# Altium PCB FPSInterface.PcbDoc
Units mm, origin at the board's own origin, x right, y up, seen from the top; angles counter-clockwise.
Board outline 30 x 25.98 mm, 4 copper layers (Top Layer, Ground Layer, Power Layer, Bottom Layer), stack 0.778 mm thick; 29 components, 25 nets, 140 pads, 63 vias.
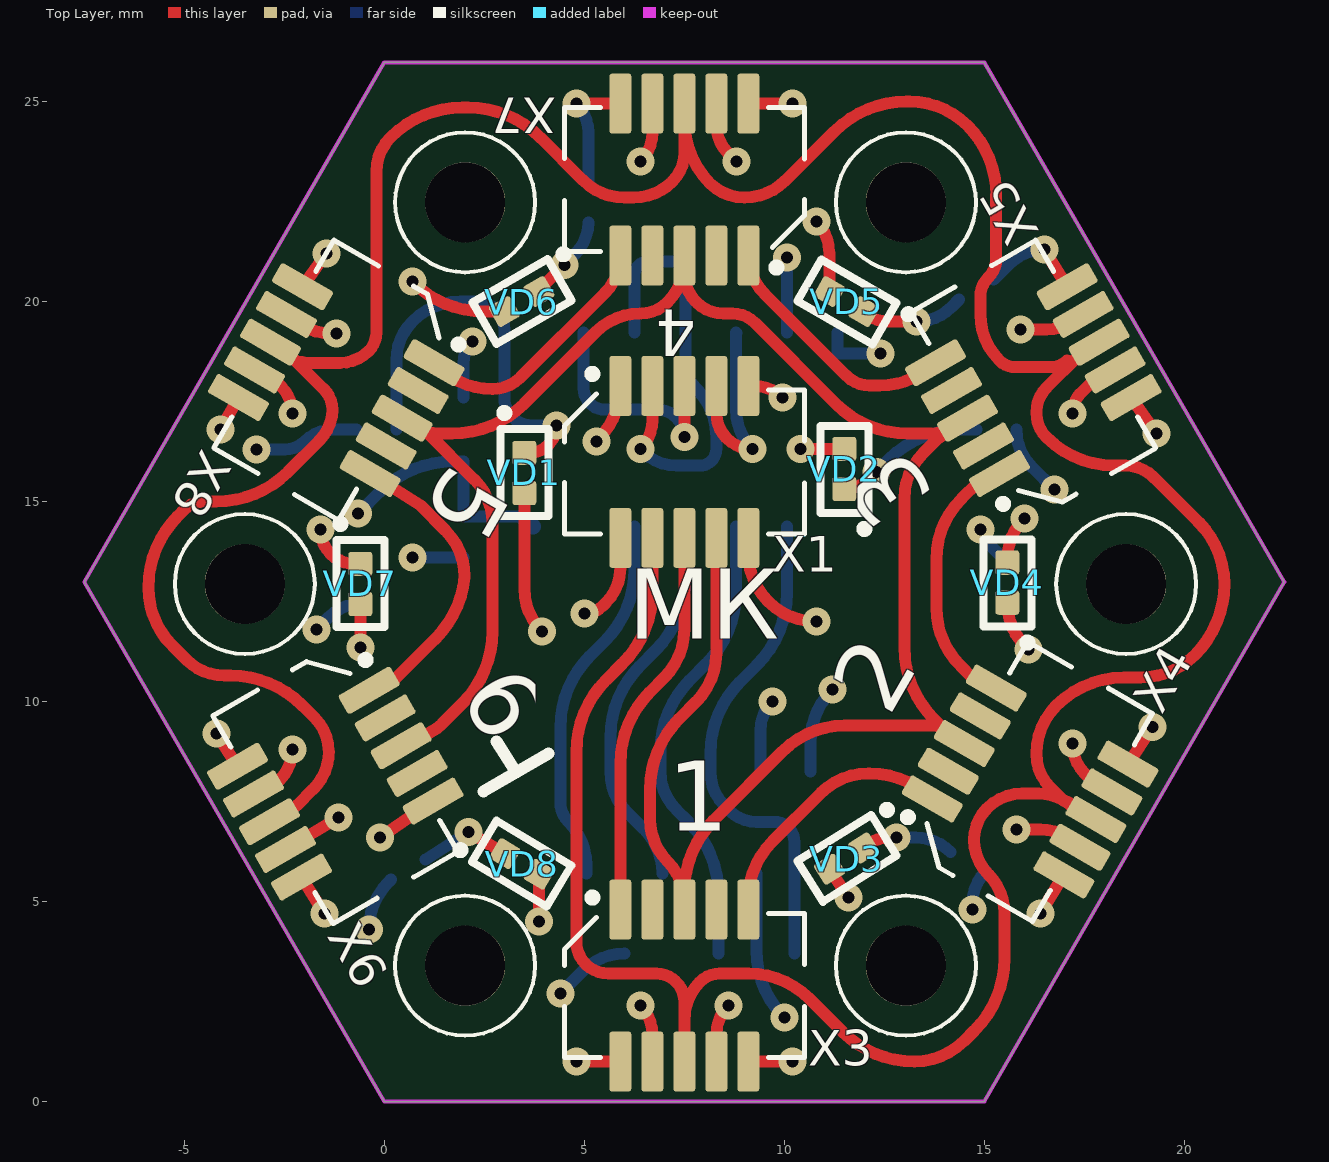
[diagram p0: Top Layer view]
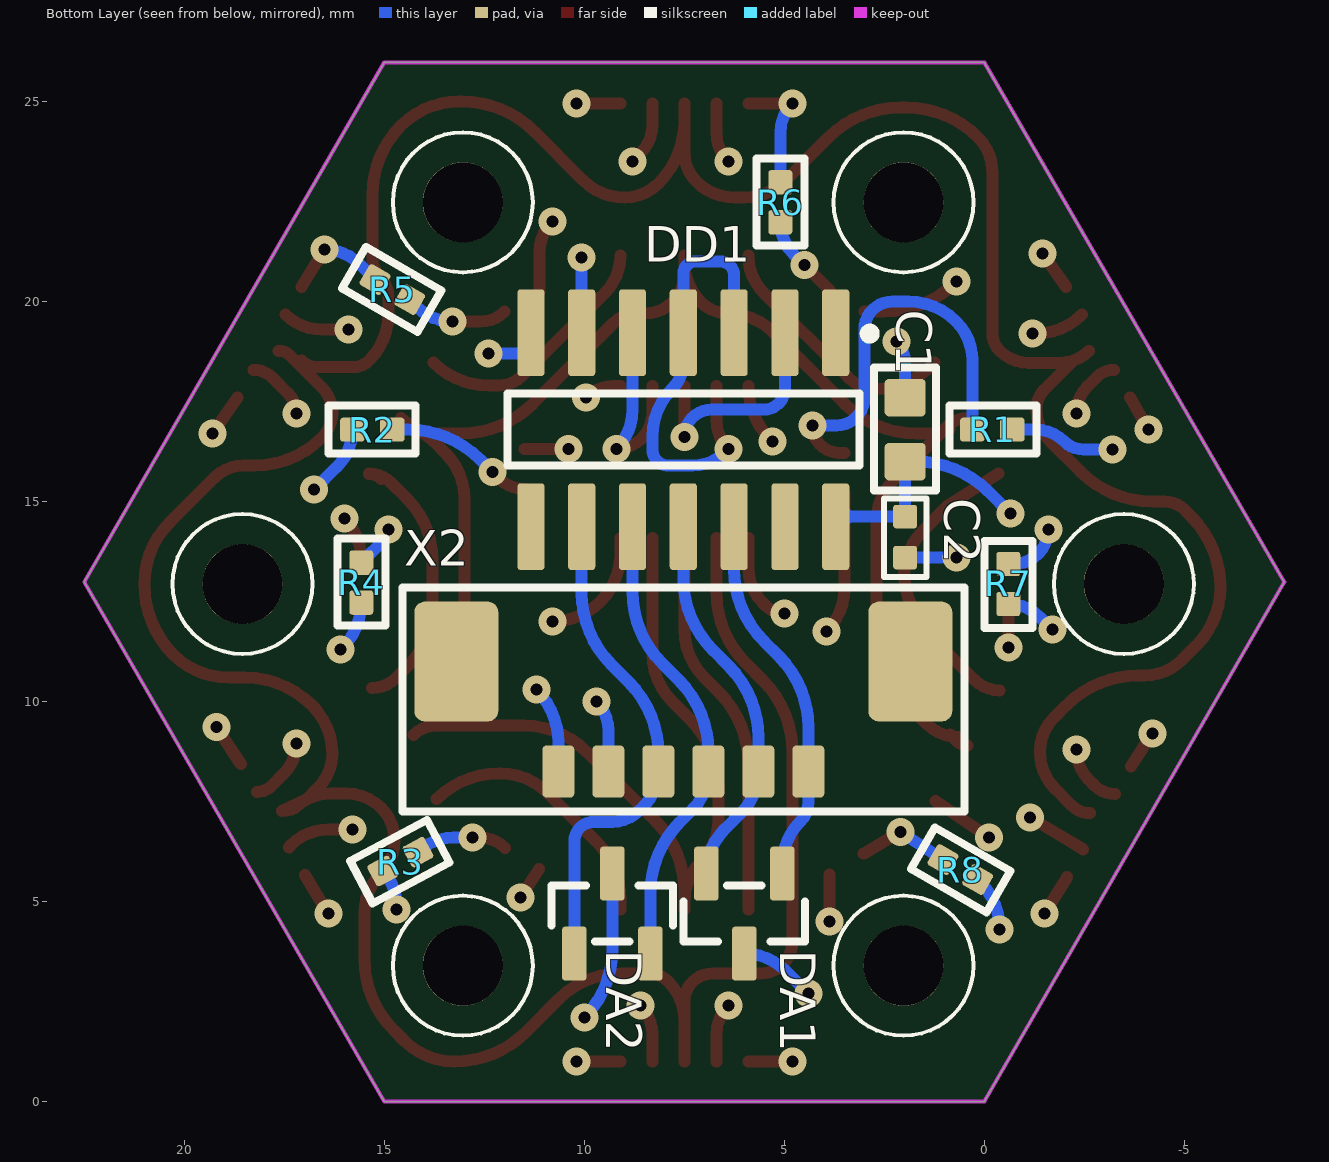
[diagram p1: Bottom Layer view, seen from below]
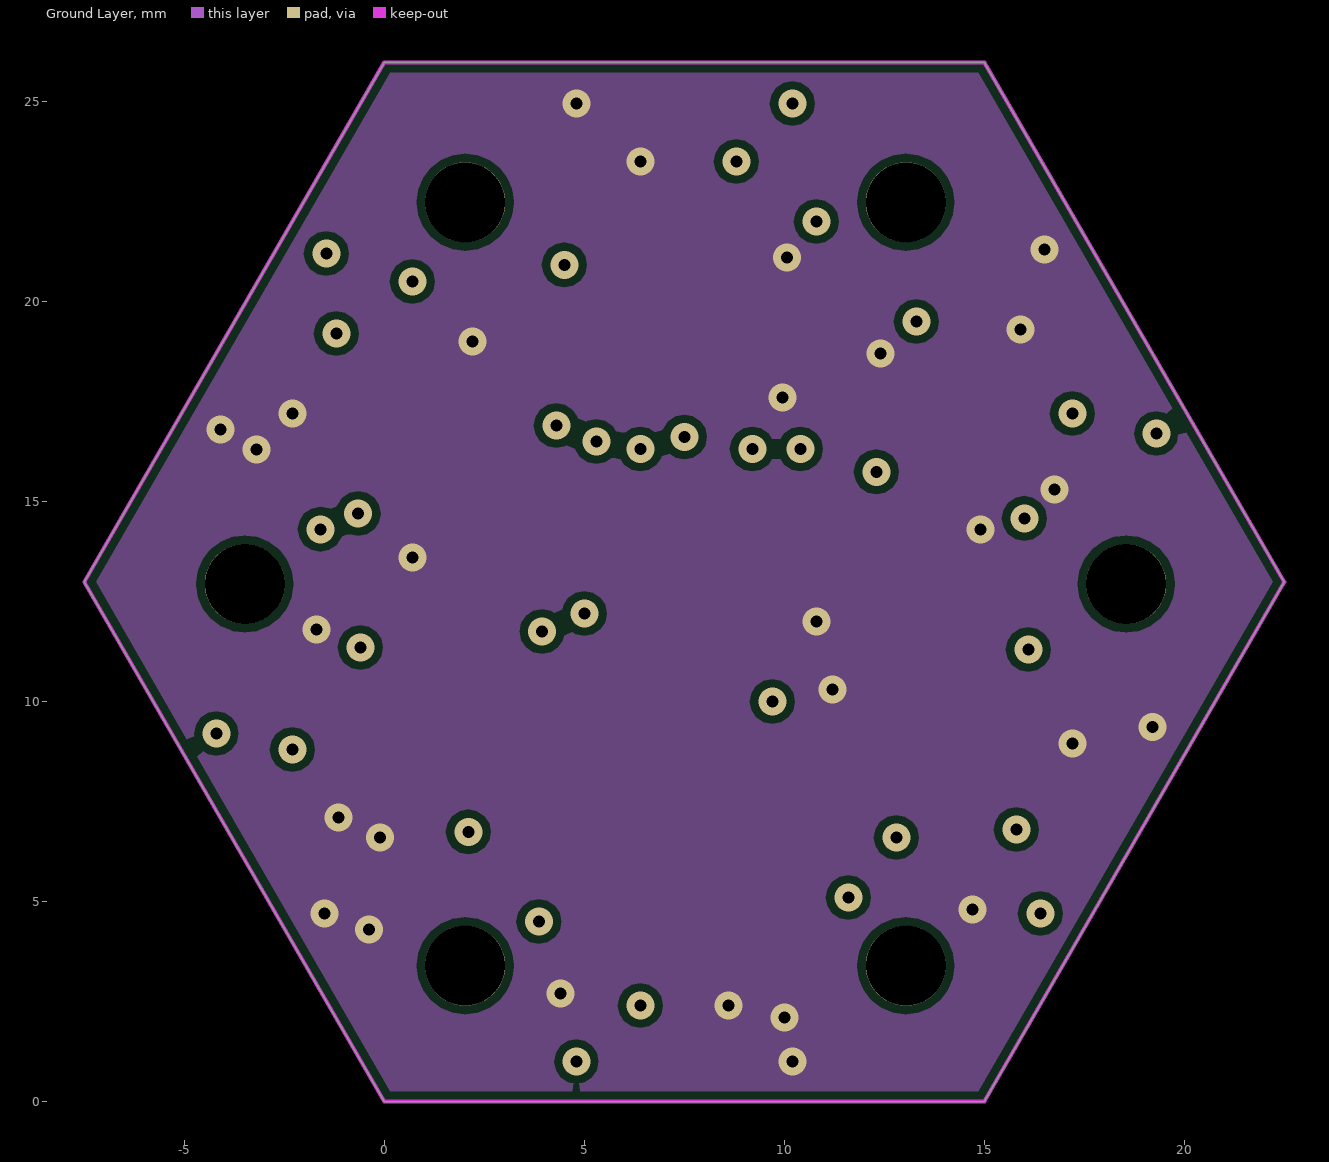
[diagram p2: Ground Layer]
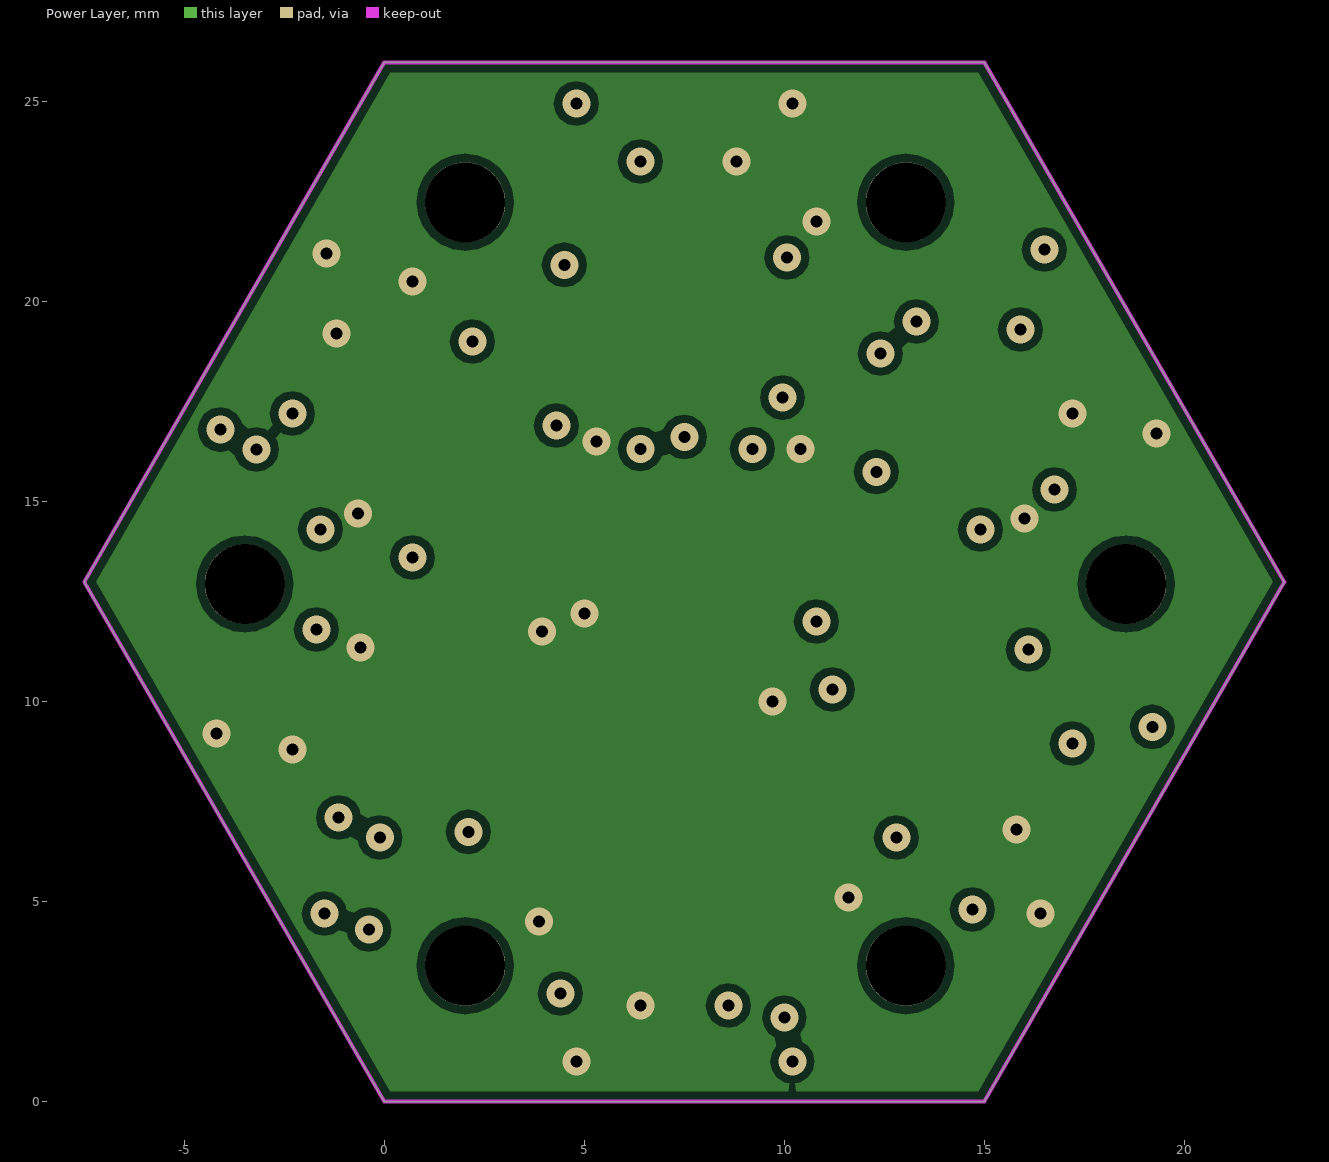
[diagram p3: Power Layer]
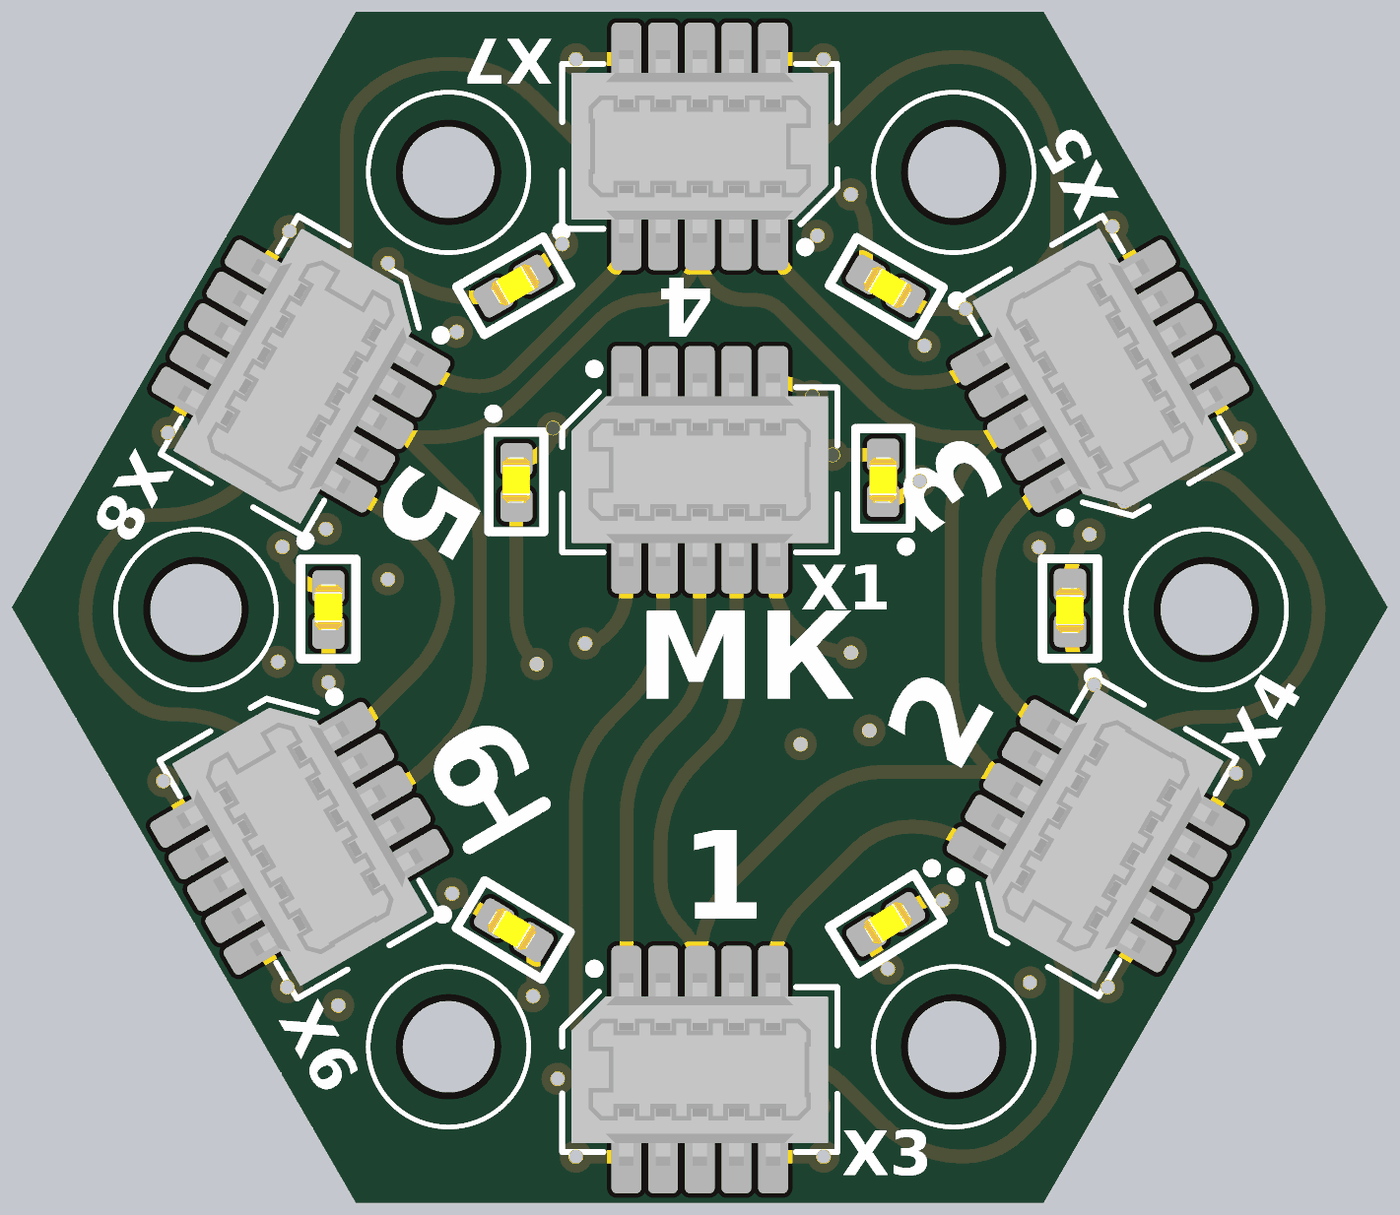
[diagram p4: 3D render of the assembled board from above, using the file's embedded part models]
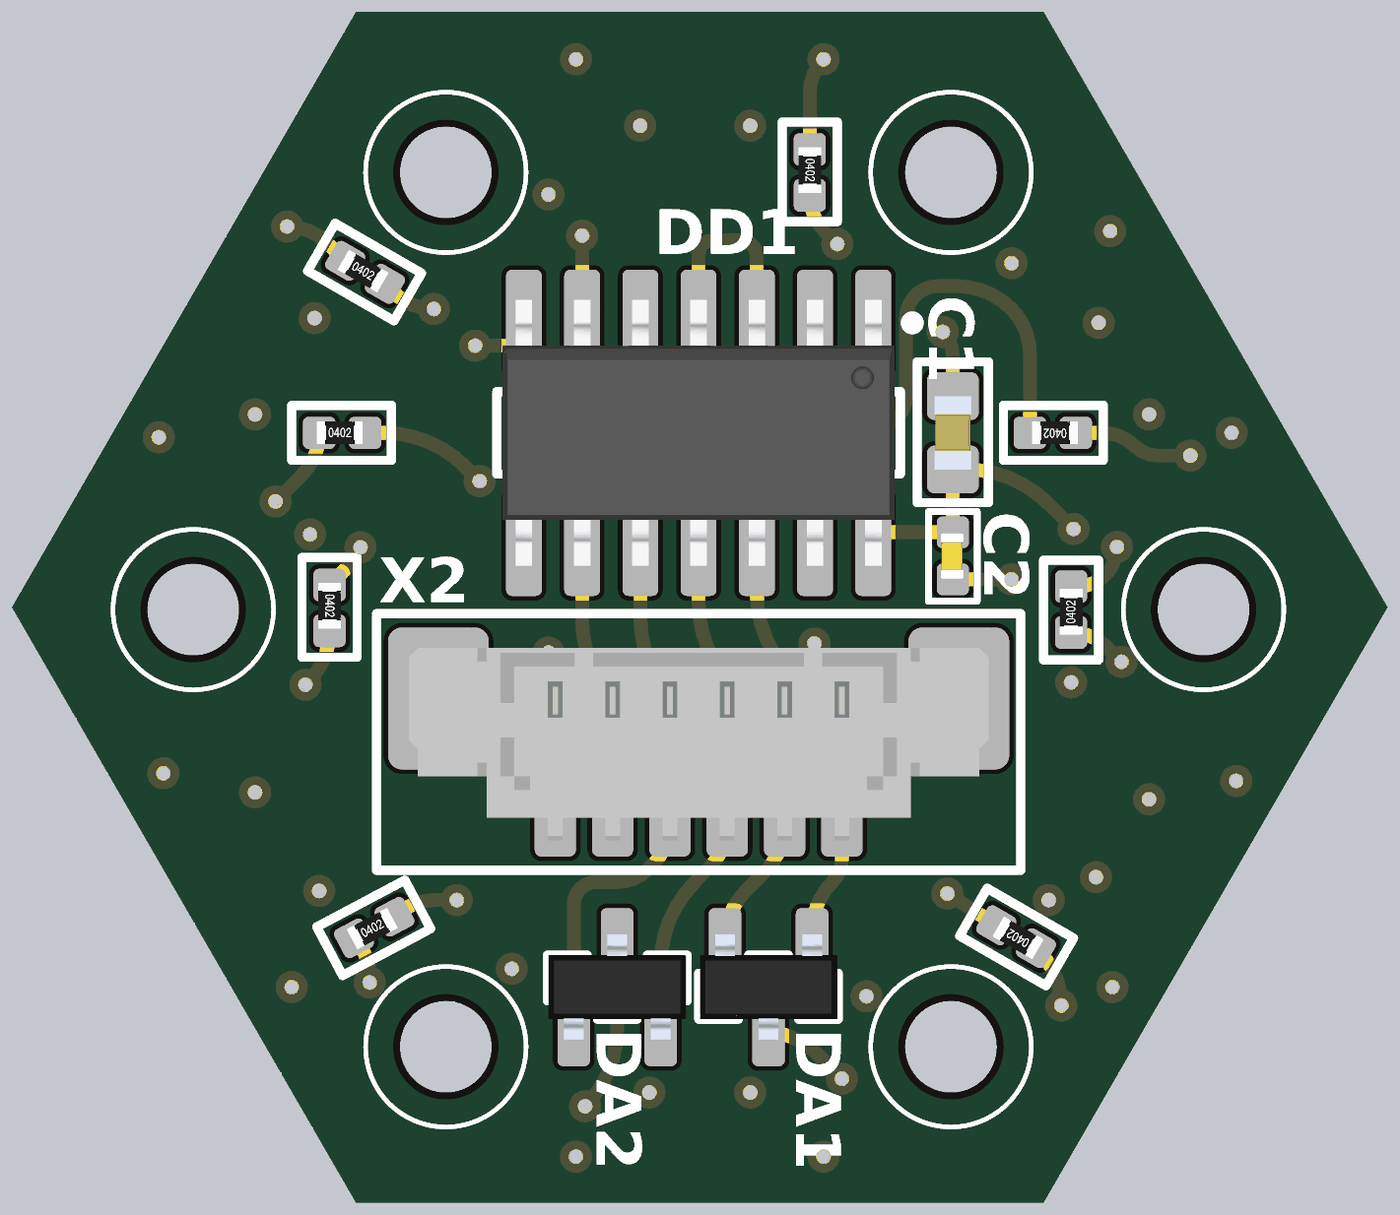
[diagram p5: 3D render of the assembled board from below, using the file's embedded part models]

## Layer stack, top to bottom
Top Solder: solder mask 0.0102, Solder Resist, Dk 3.5
Top Layer: signal copper 0.0356
Dielectric 1: core 0.254, FR-4, Dk 4.2
Ground Layer: signal copper 0.036
Dielectric 3: prepreg 0.127, Dk 4.2
Power Layer: signal copper 0.036
Dielectric 2: core 0.254, Dk 4.2
Bottom Layer: signal copper 0.0356
Bottom Solder: solder mask 0.0102, Solder Resist, Dk 3.5

## Board outline
22.5,12.99 15,25.981 0,25.981 -7.5,12.99 0,0 15,0

## Design rules (kind name [scope] priority, off if disabled: settings)
Clearance [All] p1: gap=0.2 ignorepadtopadclearanceinfootprint=FALSE
HoleSize [All] p1: absolutevalues=TRUE maxlimit=20 minlimit=0.025 maxpercent=80.000 minpercent=20.000
MinimumSolderMaskSliver [All] p1: minsoldermaskwidth=0.04
PasteMaskExpansion [All] p1: expansion=0.05
PolygonConnect PolygonConnect_via [All vs IsVia] p1: connectstyle=Direct reliefconductorwidth=0.254 reliefentries=4 polygonreliefangle="90 Angle" airgapwidth=0.254
PolygonConnect [All] p2: connectstyle=Relief reliefconductorwidth=0.6 reliefentries=4 polygonreliefangle="90 Angle" airgapwidth=0.2
RoutingVias [All] p1: holewidth=0.711 width=1.27 viastyle="Through Hole" minholewidth=0.711 minwidth=1.27 maxholewidth=0.711 maxwidth=1.27
SilkToSilkClearance [All] p1: silktosilkclearance=0
SilkToSolderMaskClearance [IsPad] p1: minsilkscreentomaskgap=0 clearancetoexposedcopper=TRUE
SolderMaskExpansion [All] p1: expansion=0.15
Width [All] p1: maxlimit=3 minlimit=0.15 preferedwidth=0.2
25 further rules are at their usual default settings.

## Components (designator, comment, footprint, x,y, rotation, side; value= is the part's Value field where it differs from the comment)
C1 "Capacitor" C0603 1.98,16.798 r270 bottom value=1мк
C2 "Capacitor" C0402 2,14.1 r90 bottom value=0,1мк
DA1 "SM712" SOT23-3 6,4.7 r270 bottom
DA2 "SM712" SOT23-3 9.3,4.7 r90 bottom
DD1 "Name" SO14 7.525,16.798 r270 bottom
R1 "Resistor_0,062Вт" R0402 -0.2,16.798 r0 bottom value=510
R2 "Resistor_0,062Вт" R0402 15.3,16.798 r180 bottom value=510
R3 "Resistor_0,062Вт" R0402 14.6,6 r152 bottom value=510
R4 "Resistor_0,062Вт" R0402 15.575,12.975 r270 bottom value=510
R5 "Resistor_0,062Вт" R0402 14.8,20.3 r210 bottom value=510
R6 "Resistor_0,062Вт" R0402 5.1,22.481 r270 bottom value=510
R7 "Resistor_0,062Вт" R0402 -0.6,12.94 r90 bottom value=510
R8 "Resistor_0,062Вт" R0402 0.6,5.8 r30 bottom value=510
VD1 "LED" L_0402_YELLOW 3.5,15.765 r270 top
VD2 "LED" L_0402_YELLOW 11.5,15.765 r90 top
VD3 "LED" L_0402_YELLOW 11.6,6.1 r212 top
VD4 "LED" L_0402_YELLOW 15.575,12.925 r90 top
VD5 "LED" L_0402_YELLOW 11.6,19.975 r150 top
VD6 "LED" L_0402_YELLOW 3.475,20.025 r210 top
VD7 "LED" L_0402_YELLOW -0.6,12.99 r270 top
VD8 "LED" L_0402_YELLOW 3.4,5.966 r329 top
X1 "\"Плата контроллера\"" SlimStack-10pin-vert-sct 7.5,15.99 r180 top locked
X2 "\"Вход\"" MOLEX_533980671 7.525,8.25 r180 bottom
X3 "Header_10_sct" SlimStack-10pin-vert-sct 7.5,2.9 r180 top locked
X4 "Header_10_sct" SlimStack-10pin-vert-sct 16.144,8 r240 top locked
X5 "Header_10_sct" SlimStack-10pin-vert-sct 16.225,18.034 r300 top locked
X6 "Header_10_sct" SlimStack-10pin-vert-sct -1.225,7.946 r120 top locked
X7 "Header_10_sct" SlimStack-10pin-vert-sct 7.5,23.05 r0 top locked
X8 "Header_10_sct" SlimStack-10pin-vert-sct -1.2,18.034 r60 top locked

## Footprints (in the part's own frame and the unit in brackets; to place one, negate y for a bottom-side part, rotate by r counter-clockwise, add the part's x,y. Pads: shape width x height; smd on the part's side, far side on the other; paste and mask are expansions set on the pad)
C0402 [mm]
  rrect25% 0.59x0.6 smd: 1(-0.5,-0.02) 2(0.525,-0.02)
  silkscreen extent -0.98,-0.55 0.98,0.51, body extent -0.49,-0.25 0.51,0.25, height 0.48
C0603 [mm]
  rrect25% 0.94x1.03 smd: 1(-0.8,0) 2(0.8,0)
  silkscreen extent -1.55,-0.78 1.53,0.77, body extent -0.8,-0.4 0.8,0.4, height 0.9
L_0402_YELLOW [mm] "SMD LED LAMP"
  rrect25% 0.61x0.6 smd: 1(-0.45,0) 2(0.55,0)
  silkscreen extent -1.55,-0.6 1.13,0.6, body extent -0.5,-0.3 0.5,0.3, height 0.2
MOLEX_533980671 [mm]
  rrect25% 0.8x1.3 smd: 1(3.125,0) 2(1.875,0) 3(0.625,0) 4(-0.625,0) 5(-1.875,0) 6(-3.125,0)
  rrect25% 2.1x3 smd: ""(-5.675,2.75) ""(5.675,2.75)
  silkscreen extent -7.03,-1 7.02,4.6, body extent -6.32,-0.35 6.33,3.85, height 4.7
R0402 [mm]
  rrect25% 0.61x0.6 smd: 1(-0.5,0) 2(0.5,0)
  silkscreen extent -1.1,-0.6 1.08,0.6, body extent -0.55,-0.25 0.45,0.25, height 0.35
SlimStack-10pin-vert-sct [mm]
  rrect25% 0.55x1.5 smd: 1(1.6,-1.9) 2(1.6,1.9) 3(0.8,-1.9) 4(0.8,1.9) 5(0,-1.9) 6(0,1.9) 7(-0.8,-1.9) 8(-0.8,1.9) 9(-1.6,-1.9) 10(-1.6,1.9)
  silkscreen extent -3,-2.3 3,1.8, body extent -2.8,-2.1 2.8,2.1, height 3.53
SO14 [mm] "SOIC, 14-Leads, Body 8,65x3,90mm, Pitch 1,27mm, IPC Medium Density"
  rrect25% 2.17x0.68 smd: 1(-2.425,3.81) 2(-2.425,2.54) 3(-2.425,1.27) 4(-2.425,0) 5(-2.425,-1.27) 6(-2.425,-2.54) 7(-2.425,-3.81) 8(2.425,-3.81) 9(2.425,-2.54) 10(2.425,-1.27) 11(2.425,0) 12(2.425,1.27) 13(2.425,2.54) 14(2.425,3.81)
  silkscreen extent -2.52,-4.4 0.9,4.78, body extent -2.9,-4.28 2.9,4.28, height 1.75
SOT23-3 [mm]
  rrect25% 1.35x0.61 smd: 1(-1,0.95) 2(-1,-0.95) 3(1,0)
  silkscreen extent -0.7,-1.52 0.7,1.52, body extent -1.15,-1.5 1.15,1.5, height 1.1

## Part data
C1: library part cap133, "Конденсатор", Manufacture=Murata, Part Name=Ceramic, Part Number=GRM188R71C105KA12D**, Voltage=16B, id=cap133, TKE=X7R
C2: library part cap277, "Конденсатор", Manufacture=Murata, Part Name=Ceramic, Part Number=GRM155R71H104KE14D, Voltage=50В, id=cap277, tga=0,10%, TKE=X7R
DA1 DA2: library part diode4, "TVS", Manufacture=Semtech, Part Name="TVS diode RS-485", Part Number=SM712.TCT, Reverse Current=1mA, id=diode4, Number=2
DD1: library part interf33, "Fail-Safe, High-Speed (10Mbps),  Slew-Rate-Limited RS-485/RS-422 Transceivers", Current Consumption=900uA, Manufacture="Maxim Integrated", Part Name="RS-485/RS-422 Transceivers", Part Number=MAX3086ESD+, Power Supply=4.75-5.25V, id=interf33, Interface=RS422/485, Mode of Work=Full-Duplex, Number of Channel=2, Speed=10Mbps, Type Supply="Single Polar"
R1 R2 R3 R4 R5 R6 R7 R8: library part res263, "Резистор", Manufacture=Yageo, Part Name=Resistor, Part Number=RC0402FR-07510RL, Power=0,062Вт, Accuracy=0,01, id=res263
VD1 VD2 VD3 VD4 VD5 VD6 VD7 VD8: library part diode29, "Светодиод", Part Name="LED yellow", Part Number=KPHHS-1005SYCK, id=diode29
X1 X3 X4 X5 X6 X7 X8: library part connect225, "Разъем - 10 конт. розетка", Manufacture=Molex, Part Name="SlimStack Board-to-Board Connector", Part Number=524651071, Contact_2=+5B, Contact_10=GND, Etch=0.8mm, id=connect225
  X1: Contact_1=+5B, Contact_3=SSI_REDE, Contact_4=CONVST_MCU, Contact_5=SSI_CLOCK, Contact_6=MISO_MCU, Contact_7=SSI_DATA, Contact_8=SCLK_MCU, Contact_9=GND
  X3: Contact_1=DOUT, Contact_3=NC, Contact_4=+5В, Contact_5=SCLK, Contact_6=CONVST, Contact_7=NC, Contact_8=GND, Contact_9=DIN
  X4 X5 X6 X7 X8: Contact_1=DOUT, Contact_3=NC, Contact_4=+5B, Contact_5=SCLK, Contact_6=CONVST, Contact_7=NC, Contact_8=GND, Contact_9=DIN
X2: library part connect226, "Разъем - 6 конт. розетка", Manufacture=Molex, Part Name="PicoBlade PCB Header", Part Number=533980671, Contact_1=DATA+, Contact_2=DATA-, Contact_3=CLK-, Contact_4=CLK+, Contact_5=+5B, Contact_6=GND, Etch=1.25mm, id=connect226

## Free pads (board coordinates)
  round 2 hole 2 unplated: ""(-3.488,12.939) ""(2.021,3.397) ""(2.021,22.481) ""(13.038,3.397) ""(13.039,22.481) ""(18.547,12.939)

## Via types
v1: diameter 0.7, hole 0.3, Top Layer to Bottom Layer, tented both sides, 63 vias

## Nets (pads, with @x,y where several pads share a name; then routed paths per layer and width w, separated by ;. In a path a pad name is that pad's centre, name@x,y a point inside that pad or via, vN(x,y) a via of type N, cw(c..) or ccw(c..) an arc to the next point about the centre after c; other vN are vias at no path point)
+5B: C1.2 C2.2 DD1.14 VD1.2 VD2.2 VD3.2 VD4.2 VD5.2 VD6.2 VD7.2 VD8.2 X1.1 X1.2 X2.5 X3.2 X3.4 X4.2 X4.4 X5.2 X5.4 X6.2 X6.4 X7.2 X7.4 X8.2 X8.4 | length 41.2
  Top Layer w0.3: v1(-4.2,9.2) X6.2 ; X6.4 ccw(c-3.27,8.419) -2.754,7.903 -2.613,8.044 ccw(c-3.369,8.8) v1(-2.3,8.8) ; X8.4 ccw(c-1.293,20.83) -1.293,19.2 v1(-1.2,19.2) ; X8.2 v1(-1.451,21.2) ; v1(-0.6,11.352) VD7.2 ; v1(0.7,20.5) 0.706,20.494 ccw(c2.502,22.29) 2.502,19.75 VD6.2 ; VD1.2 3.5,12.822 ccw(c5.013,12.822) v1(3.943,11.752) ; v1(3.865,4.5) 3.872,4.507 VD8.2 ; v1(4.8,1) X3.2 ; v1(5,12.2) ccw(c5,12.849) 5.459,12.39 5.544,12.475 ccw(c4.684,13.335) 5.9,13.335 X1.2 ; v1(5.3,16.5) 5.341,16.541 ccw(c3.992,17.89) X1.1 ; v1(6.4,2.4) cw(c5.676,1.676) 6.7,1.676 X3.4 ; X7.4 8.3,24.424 ccw(c9.324,24.424) 8.6,23.7 v1(8.8,23.5) ; X7.2 v1(10.2,24.95) ; v1(10.4,16.315) VD2.2 ; v1(10.8,22) cw(c10.019,21.219) 11.123,21.219 VD5.2 ; VD3.2 v1(11.6,5.1) ; VD4.2 15.575,13.553 cw(c17.026,13.553) v1(16,14.579) ; v1(15.8,6.8) 16.4,6.8 cw(c16.4,5.481) 17.333,6.414 X4.4 ; v1(16.4,4.7) X4.2 ; v1(17.2,17.2) cw(c17.923,17.2) 17.412,17.711 17.796,18.095 cw(c18.27,17.62) X5.4 ; X5.2 v1(19.3,16.7)
  Bottom Layer w0.3: v1(-0.653,14.7) -0.099,15.254 cw(c1.698,13.458) 1.698,15.998 C1.2 C2.2 DD1.14@3.463,14.625 ; X2.5 9.4,9.276 cw(c10.424,9.276) v1(9.7,10)
  Bottom Layer w0.4: DD1.14@3.463,14.625 DD1.14
GND: C1.1 C2.1 DA1.3 DA2.3 DD1.6 DD1.7 R1.1 R2.1 R3.1 R4.1 R5.1 R6.1 R7.1 R8.1 X1.9 X1.10 X2.6 X3.8 X3.10 X4.8 X4.10 X5.8 X5.10 X6.8 X6.9 X6.10 X7.8 X7.10 X8.8 X8.10 | length 48.6
  Top Layer w0.3: v1(-4.1,16.798) X8.10 ; X8.8 cw(c-3.245,17.679) -2.812,18.112 -2.583,17.883 cw(c-3.266,17.2) v1(-2.3,17.2) ; X6.8 v1(-1.141,7.1) ; X6.10 v1(-1.5,4.7) ; v1(-0.112,6.6) X6.9 ; v1(4.8,24.95) X7.10 ; v1(6.4,23.5) ccw(c5.676,24.224) 6.7,24.224 X7.8 ; X3.8 8.3,1.676 cw(c9.324,1.676) v1(8.6,2.4) ; X3.10 v1(10.2,1) ; X1.10 9.1,13.7 ccw(c10.8,13.7) v1(10.8,12) ; X1.9 9.252,17.89 cw(c9.252,16.895) v1(9.956,17.599) ; v1(15.9,19.3) 16.56,19.3 ccw(c16.56,20.588) X5.8 ; v1(16.5,21.3) X5.10 ; v1(17.2,8.95) ccw(c18.258,8.95) 17.51,8.202 17.813,7.899 ccw(c18.189,8.274) X4.8 ; X4.10 v1(19.2,9.366)
  Bottom Layer w0.3: v1(-3.2,16.3) -2.483,16.3 ccw(c-2.483,16.983) -2,16.5 cw(c-1.281,15.781) -1.281,16.798 R1.1 ; v1(-1.7,11.8) -1.385,12.115 cw(c-0.6,11.33) R7.1 ; v1(-0.386,4.3) cw(c1.298,4.3) 0.108,5.491 R8.1 ; v1(0.7,13.6) C2.1 ; C1.1 1.98,18.469 cw(c2.731,18.469) v1(2.2,19) ; v1(4.4,2.7) 4.976,3.276 cw(c6,2.251) DA1.3 ; v1(4.8,24.95) cw(c4.076,24.226) 5.1,24.226 R6.1 ; DA2.3 9.3,3.79 ccw(c11.69,3.79) v1(10,2.1) ; DD1.6 v1(10.065,21.1) v1@10.065,21.19 ; X2.6 10.65,8.972 cw(c12.528,8.972) v1(11.2,10.3) ; DD1.7 11.335,18.7 v1(12.4,18.7) ; v1(14.7,4.8) 14.7,4.941 cw(c15.866,4.941) R3.1 ; v1(14.9,14.3) ccw(c15.262,14.3) 15.006,14.044 R4.1 ; R5.1 15.617,20.934 cw(c16.5,20.052) v1(16.5,21.3) ; R2.1 ccw(c17.115,16.798) 16.185,15.868 v1(16.753,15.3)
MCU_CONVST: X1.4 X3.6 X4.6 X5.6 X6.6 X7.6 X8.6 | length 104.4
  Top Layer w0.3: X6.6@-2.643,7.212 ccw(c-2.643,7.853) -2.19,7.399 -1.772,7.817 ccw(c-2.698,8.742) -1.389,8.742 ccw(c-2.599,8.742) -1.743,9.598 -2.052,9.906 ccw(c-3.848,8.11) -3.848,10.65 -4,10.65 cw(c-4,11.979) -4.94,11.04 -5.3,11.4 cw(c-3.853,12.848) -5.9,12.848 cw(c-3.36,12.848) -5.156,14.644 -5.012,14.788 cw(c-4.5,14.276) -4.5,15 -4.204,15 ccw(c-4.204,17.54) -2.408,15.744 -1.617,16.535 ccw(c-2.381,17.3) -1.3,17.3 ccw(c-2.024,17.3) -1.512,17.812 -2.224,18.524 ; X8.6@-2.618,18.769 ccw(c-1.896,19.491) -2.224,18.524 ; X1.4 6.7,12.746 cw(c4.16,12.746) 5.956,10.95 5.544,10.538 ccw(c7.34,8.742) 4.8,8.742 4.8,4 ccw(c5.6,4) 5.6,3.2 6.8,3.2 cw(c6.8,2.5) 7.5,2.5 7.5,2.034 ; X3.6 7.5,2.034 ; X7.6 X7.6@7.5,24.514 ; 10.024,23.024 cw(c9,24.049) 9,22.6 cw(c9,23.807) 8.146,22.954 cw(c9.707,24.514) X7.6@7.5,24.514 ; 10.024,23.024 11.256,24.256 cw(c13.052,22.46) 13.052,25 13.131,25 cw(c13.131,22.951) 14.58,24.4 cw(c12.845,22.665) 15.298,22.665 15.298,21.078 cw(c14.622,21.078) 15.1,20.6 ccw(c15.583,20.117) 14.9,20.117 14.9,19.682 ccw(c16.537,19.682) 15.38,18.524 ccw(c15.776,18.92) 15.776,18.36 16.674,18.36 ccw(c16.674,18.92) 17.07,18.524 ; X5.6@17.643,18.769 ccw(c17.643,18.361) 17.355,18.65 16.56,17.855 ccw(c17.189,17.227) 16.3,17.227 ccw(c17.186,17.227) 16.56,16.6 ccw(c18.25,18.29) 18.25,15.9 18.528,15.9 cw(c18.528,14.899) 19.236,15.607 20.361,14.482 cw(c18.817,12.938) 21,12.938 cw(c18.493,12.938) 20.266,11.166 cw(c18.9,12.531) 18.9,10.6 18.49,10.6 ccw(c18.49,8.21) 16.8,9.9 ccw(c18.007,8.693) 16.3,8.693 ccw(c17.49,8.693) 16.649,7.851 16.953,7.547 ; -2.224,18.524 ccw(c-1.896,19.491) -1.896,18.47 -1.108,18.47 ccw(c-1.108,19.491) -0.386,18.769 ccw(c-0.834,19.217) -0.2,19.217 -0.2,23.247 cw(c1.015,23.247) 0.156,24.106 cw(c1.952,22.31) 1.952,24.85 2.098,24.85 cw(c2.098,22.31) 3.894,24.106 4.976,23.024 ccw(c6,24.049) 6,22.6 6.234,22.6 ccw(c6.234,23.966) 7.2,23 ccw(c6.476,23.724) 7.5,23.724 X7.6@7.5,24.514 ; 7.5,2.034 cw(c8.866,2.034) 7.9,3 cw(c8.383,2.517) 8.383,3.2 9.1,3.2 cw(c9.1,1.027) 10.636,2.564 11.456,1.744 ccw(c13.252,3.54) 13.252,1 ccw(c13.252,2.756) 14.494,1.514 14.756,1.776 ccw(c12.96,3.573) 15.5,3.573 15.5,4.717 ccw(c14.134,4.717) 15.1,5.683 cw(c15.96,6.542) 14.744,6.542 cw(c15.873,6.542) 15.075,7.341 cw(c15.942,6.474) 15.942,7.7 16.357,7.7 cw(c16.357,6.461) 16.953,7.547 ; 16.953,7.547 cw(c16.357,6.461) 17.233,7.337 ccw(c17.562,8.055) 17.562,7.265 16.953,7.547
MCU_SCLK: X1.8 X3.5 X4.5 X5.5 X6.5 X7.5 X8.5 | length 55.6
  Top Layer w0.3: X6.5 ccw(c0.42,9.268) 0.683,9.005 X6.5@0.8,9.122 ; X8.5 cw(c0.445,16.432) 0.907,16.893 X8.5@1.063,16.737 ; X6.5@0.648,9.112 ccw(c0.648,10.231) X6.5@0.8,9.122 ; X6.5@0.856,9.178 X6.5@0.8,9.122 ; X8.5@0.873,16.799 ccw(c1.374,18.013) X8.5@1.063,16.737 ; 5.285,19.238 cw(c6.4,18.123) 6.4,19.7 ccw(c6.4,20.666) 7.083,19.983 ccw(c6.076,20.99) X7.5@7.5,20.99 ; 5.285,19.238 3.491,17.444 cw(c1.695,19.24) 1.695,16.7 1.374,16.7 cw(c1.374,18.013) X8.5@1.063,16.737 ; X3.5 X3.5@7.5,4.993 ; X7.5 X7.5@7.5,20.99 ; X1.8 8.3,11.207 cw(c6.593,11.207) 7.8,10 7.382,9.582 ccw(c9.164,7.8) 6.644,7.8 6.644,7.06 ccw(c8.142,7.06) 7.083,6 cw(c6.076,4.993) X3.5@7.5,4.993 ; 13.878,9.422 13.744,9.556 cw(c15.54,11.352) 13,11.352 13,15.083 cw(c14.58,15.083) 13.463,16.2 13.78,16.517 X5.5@14.148,16.798 ; X4.5@14.271,9.165 ccw(c13.704,8.598) 13.934,9.366 ccw(c13.704,8.598) 13.704,9.4 11.511,9.4 ccw(c11.511,7.201) 9.956,8.756 8.244,7.044 ccw(c10.04,5.248) 7.5,5.248 X3.5@7.5,4.993 ; X5.5 cw(c13.651,18.013) X5.5@14.148,16.798 ; X6.5@0.8,9.122 ccw(c0.648,10.231) 1.44,9.44 1.956,9.956 ccw(c0.16,11.752) 2.7,11.752 2.7,14.482 ccw(c1.208,14.482) 2.263,15.537 X8.5@1.063,16.737 ; X7.5@7.5,20.99 7.5,20.707 ccw(c8.524,20.707) 7.8,19.983 ccw(c8.483,20.666) 8.483,19.7 8.7,19.7 cw(c8.7,18.895) 9.269,19.464 11.289,17.444 ccw(c13.085,19.24) 13.085,16.7 13.651,16.7 ccw(c13.651,18.013) X5.5@14.148,16.798
NetDA1_1: DA1.1 DD1.12 X2.1 | length 9.4
  Bottom Layer w0.3: DA1.1 5.05,5.914 ccw(c3.514,5.914) 4.6,7 cw(c5.083,7.483) 4.4,7.483 X2.1 4.4,9.348 cw(c6.94,9.348) 5.144,11.144 5.511,11.511 ccw(c3.715,13.307) 6.255,13.307 DD1.12
NetDA1_2: DA1.2 DD1.11 X2.2 | length 9.6
  Bottom Layer w0.3: DA1.2 ccw(c5.381,5.7) 6.49,6.81 6.074,7.226 cw(c7.099,8.25) X2.2 5.65,9.098 cw(c8.19,9.098) 6.394,10.894 6.781,11.281 ccw(c4.985,13.077) 7.525,13.077 DD1.11
NetDA2_1: DA2.1 DD1.9 X2.4 | length 12.6
  Bottom Layer w0.3: DD1.9 10.065,12.717 cw(c7.525,12.717) 9.321,10.921 8.894,10.494 ccw(c10.69,8.698) 8.15,8.698 X2.4 ccw(c9.357,8.25) 8.504,7.396 8.627,7.273 ccw(c9.3,7.945) 9.3,6.994 9.756,6.994 cw(c9.756,6.5) 10.25,6.5 DA2.1
NetDA2_2: DA2.2 DD1.10 X2.3 | length 11.7
  Bottom Layer w0.3: DA2.2 8.35,5.198 ccw(c5.81,5.198) 7.606,6.994 7.289,7.311 cw(c8.228,8.25) X2.3 6.9,8.748 cw(c9.44,8.748) 7.644,10.544 8.051,10.951 ccw(c6.255,12.747) 8.795,12.747 DD1.10
NetR1_2: R1.2 VD1.1 | length 10.2
  Top Layer w0.3: VD1.1 3.615,16.215 ccw(c3.615,16.9) v1(4.3,16.9)
  Bottom Layer w0.3: R1.2 0.3,18.527 cw(c1.683,18.527) 0.705,19.505 cw(c1.9,18.31) 1.9,20 2.3,20 cw(c2.3,19.3) 3,19.3 3,17.6 ccw(c3.7,17.6) 3.7,16.9 v1(4.3,16.9)
NetR2_2: R2.2 VD2.1 | length 3.8
  Top Layer w0.3: VD2.1 ccw(c11.5,16.212) 12.134,15.578 v1(12.3,15.744)
  Bottom Layer w0.3: v1(12.3,15.744) 12.61,16.054 cw(c14.406,14.258) 14.406,16.798 R2.2
NetR3_2: R3.2 VD3.1 | length 2.3
  Top Layer w0.3: VD3.1 cw(c12.613,5.706) 12.613,6.6 v1(12.8,6.6)
  Bottom Layer w0.3: v1(12.8,6.6) 13.277,6.6 cw(c13.277,5.353) R3.2
NetR4_2: R4.2 VD4.1 | length 2.7
  Top Layer w0.3: VD4.1 ccw(c17.144,12.475) 16.034,11.366 v1(16.1,11.3)
  Bottom Layer w0.3: R4.2 ccw(c17.144,12.475) 16.034,11.366 v1(16.1,11.3)
NetR5_2: R5.2 VD5.1 | length 2.6
  Top Layer w0.3: VD5.1 ccw(c12.593,20.353) 12.593,19.5 v1(13.3,19.5)
  Bottom Layer w0.3: v1(13.3,19.5) ccw(c13.3,20.747) 14.182,19.865 R5.2
NetR6_2: R6.2 VD6.1 | length 2.2
  Top Layer w0.3: VD6.1 cw(c3.943,20.25) 3.888,20.305 v1(4.5,20.918)
  Bottom Layer w0.3: v1(4.5,20.918) 4.772,21.19 ccw(c3.982,21.981) R6.2
NetR7_2: R7.2 VD7.1 | length 3
  Top Layer w0.3: v1(-1.6,14.308) ccw(c-0.733,14.308) -0.733,13.44 VD7.1
  Bottom Layer w0.3: v1(-1.6,14.308) ccw(c-0.733,14.308) -0.733,13.44 R7.2
NetR8_2: R8.2 VD8.1 | length 2.3
  Top Layer w0.3: v1(2.1,6.742) VD8.1
  Bottom Layer w0.3: R8.2 v1(2.1,6.742)
NetX1_6: X1.6 X3.1 | length 9.8
  Top Layer w0.3: X3.1 5.9,8.448 cw(c8.44,8.448) 6.644,10.244 7,10.6 ccw(c5.793,11.807) 7.5,11.807 X1.6
NetX3_9: X3.9 X4.1 | length 6.7
  Top Layer w0.3: X3.9 9.1,5.052 cw(c11.148,5.052) 9.7,6.5 10.911,7.711 cw(c12.1,6.522) 12.1,8.203 12.135,8.203 cw(c12.135,6.001) X4.1@13.692,7.558
NetX4_9: X4.9 X5.1 | length 7.1
  Top Layer w0.3: X5.1@15.077,15.565 cw(c15.386,15.256) X5.1@15.386,15.693 ; X4.9@15.304,10.342 cw(c15.304,11.177) 14.714,10.586 14.4,10.9 cw(c15.849,12.349) 13.8,12.349 13.8,13.553 cw(c15.941,13.553) 14.427,15.067 14.832,15.472 cw(c15.38,14.925) X5.1
NetX5_9: X5.9 X7.1 | length 6.4
  Top Layer w0.3: X7.1 ccw(c10.428,21.15) 9.489,20.211 11.563,18.137 ccw(c12.135,18.708) 12.135,17.9 12.383,17.9 ccw(c12.383,19.867) X5.9@13.774,18.476
NetX6_1: X6.1 X8.9 | length 7.6
  Top Layer w0.3: X6.1 ccw(c-0.38,11.173) 0.25,10.543 1.277,11.569 ccw(c-0.519,13.365) 2.009,13.119 ccw(c0.371,13.119) 1.529,14.278 0.907,14.9 X8.9
NetX7_9: X7.9 X8.1 | length 6.4
  Top Layer w0.3: X8.1@1.251,18.476 1.361,18.367 ccw(c2.7,19.706) 2.7,17.812 ccw(c2.7,18.806) 3.403,18.103 5.511,20.211 ccw(c4.572,21.15) X7.9
SSI_CLOCK: DD1.2 X1.5 | length 5.9
  Top Layer w0.3: v1(7.5,16.615) X1.5
  Bottom Layer w0.3: DD1.2 4.985,17.826 ccw(c5.511,17.826) 5.511,17.3 6.815,17.3 cw(c6.815,16.615) v1(7.5,16.615)
SSI_DATA: DD1.5 X1.7 | length 5.1
  Top Layer w0.3: X1.7 8.3,17.215 ccw(c9.2,17.215) v1(9.2,16.315)
  Bottom Layer w0.3: DD1.5@8.8,19.218 DD1.5 8.795,17.293 ccw(c10.178,17.293) v1(9.2,16.315)
SSI_REDE: DD1.3 DD1.4 X1.3 | length 11.6
  Top Layer w0.3: v1(6.4,16.315) ccw(c5.676,17.039) 6.7,17.039 X1.3
  Bottom Layer w0.3: DD1.3 6.255,20.655 cw(c6.6,20.655) 6.6,21 7.225,21 cw(c7.225,20.7) 7.525,20.7 DD1.4 7.525,18.49 ccw(c8.464,18.49) 7.8,17.826 cw(c6.593,16.619) 8.3,16.619 8.3,16.315 cw(c7.882,16.315) 7.882,15.898 7.3,15.898 cw(c7.3,17.062) 6.477,16.239 v1(6.4,16.315)
pads on no net: DD1.1 DD1.8 DD1.13 X2. X3.3 X3.7 X4.3 X4.7 X5.3 X5.7 X6.3 X6.7 X7.3 X7.7 X8.3 X8.7

## Polygon pours and split planes (outlines as drawn)
+5B on Power Layer "Top Signal Layer-No Net" (solid, remove dead copper, pour order 0): 0,0 15,0 22.5,12.99 15,25.981 0,25.981 -7.5,12.99
GND on Ground Layer "Top Signal Layer-No Net" (solid, remove dead copper, pour order 2): 0,0 15,0 22.5,12.99 15,25.981 0,25.981 -7.5,12.99

## Keep-outs
Keep-Out Layer:
  the board outline again, w0.1

## Silkscreen, mask and mechanical layers (free items; w line width, h text height)
Top Overlay:
  circle w0.1: c2.021,3.397 r1.75
  circle w0.1: c-3.488,12.939 r1.75
  circle w0.1: c2.021,22.481 r1.75
  circle w0.1: c13.039,22.481 r1.75
  circle w0.1: c18.547,12.939 r1.75
  circle w0.1: c13.038,3.397 r1.75
  lines w0.3: 2.479,7.755 4.1,8.7 ; 2.809,9 3.289,8.227
  text "4" at 7.8,20.183 h2 r180
  text "5" at 1.2,16.3 h3 r240
  text "3" at 14.245,15.497 h3 r125
  text "МК" at 6.1,10.994 h3
  text "6" at 1.372,9.9 h3 r300
  text "2" at 13.106,9.3 h3 r60
  text "1" at 7.083,6.2 h3
Bottom Overlay:
  circle w0.1: c18.547,12.939 r1.75
  circle w0.1: c13.038,3.397 r1.75
  circle w0.1: c2.021,3.397 r1.75
  circle w0.1: c-3.488,12.939 r1.75
  circle w0.1: c13.039,22.481 r1.75
  circle w0.1: c2.021,22.481 r1.75